# EAGLE board attiny_bo_1l (EAGLE 6.2)
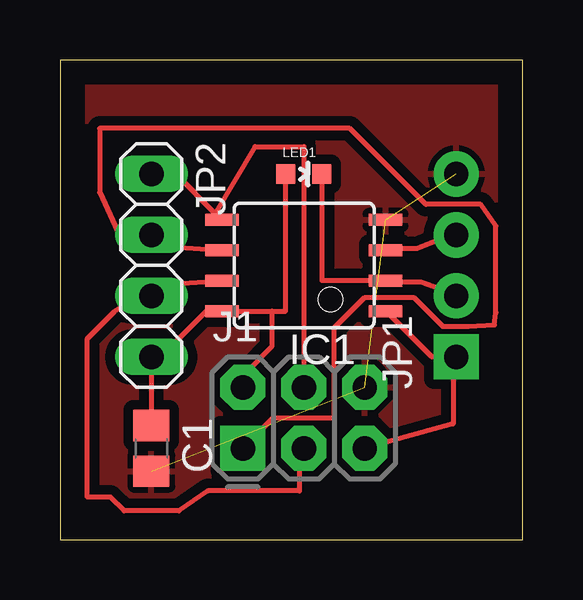
[diagram p0: board, top side]

Size 19.28 x 19.99 mm. Coordinates in mm from the lower left corner, seen from the top.
Outline: 0,0 19.28,0 19.28,19.99 0,19.99 0,0
Copper layers 1: Top 0.035mm
Design rules: minimum track width 8mil, minimum drill 24mil, track to track 8mil, track to pad 8mil, pad to pad 8mil, via to via 8mil, smd to smd 8mil, copper to edge 40mil, drill to drill 8mil, minimum pad ring 10mil, minimum via ring 8mil, stop-mask expansion 4mil, vias tented up to drill 0mil, thermal gap 10mil

## Footprints (pad centres in the part's own frame; a part is rotated, then mirrored left to right if it is on the bottom)
C0805 = smd 1.3 x 1.5: 1 -0.95,0; 2 0.95,0
8S2 = smd 0.5 x 1.4: 1 -1.905,-3.404; 2 -0.645,-3.404; 3 0.625,-3.404; 4 1.895,-3.404; 5 1.905,3.404; 6 0.635,3.404; 7 -0.635,3.404; 8 -1.905,3.404
2X3-NS = drill 1.016 pad 1.88 square: 1 -2.54,-1.27 | drill 1.016 pad 1.88 octagon: 2 -2.54,1.27; 3 0,-1.27; 4 0,1.27; 5 2.54,-1.27; 6 2.54,1.27
1X04_NO_SILK = drill 1.016 pad 1.88 square: 1 0,0 | drill 1.016 pad 1.88: 2 2.54,0; 3 5.08,0; 4 7.62,0
1X04 = drill 1.016 long: 1 -3.81,0; 2 -1.27,0; 3 1.27,0; 4 3.81,0
LED-0603 = smd 0.8 x 0.8: A 0,-0.75; C 0,0.75

## Placement (x,y rotation side)
C1  [C0805]  3.81,3.81 270 top
IC1  ATTiny85  [8S2]  10.16,11.43 90 top
J1  AVR_SPI_PRG_6NS  [2X3-NS]  10.16,5.08 0 top
JP1  [1X04_NO_SILK]  16.51,7.62 90 top
JP2  [1X04]  3.81,11.43 270 top
LED1  [LED-0603]  10.16,15.24 270 top

## Library data of the parts
C1 = rcl
IC1 = atmel; MPN: ATTINY13-20SU; OC_FARNELL: 9171568; OC_NEWARK: 96K6522
J1 JP1 = SparkFun-Connectors
JP2 = pinhead
LED1 = SparkFun-LED

## Nets
+5V: C1.1 IC1.8 J1.2 JP2.4 LED1.A
GND: C1.2 IC1.4 J1.6 JP1.4
IN1/MISO: IC1.6 J1.1 JP2.2
N$1: IC1.3 JP1.3
N$3: IC1.2 JP1.2 LED1.C
N$6: IC1.1 J1.5 JP1.1
SCL/SCK: IC1.7 J1.3 JP2.3
SDA/MOSI: IC1.5 J1.4 JP2.1

## Tracks (layer width: path | path; a pad name or v marks a point on that pad's centre or on a via)
+5V
  Top 0.203: C1.1 JP2.4 4.45,8.26 4.83,8.26 6.1,9.53 IC1.8 8.83,9.53 | 8.83,9.53 9.4,9.53 9.4,15.24 LED1.A | J1.2 7.62,7.18 7.94,7.18 8.83,8.06 8.83,9.53
GND  (3 unrouted)
  pour Top (isolate 0.406): 0,19.94 0,0 35.81,0 35.81,19.94
IN1/MISO
  Top 0.203: IC1.6 6.73,12.06 4.95,12.19 JP2.2 3.3,12.83 2.41,12.83 1.65,14.48 1.65,17.14 12.06,17.14 15.24,13.97 17.53,13.97 18.16,13.08 18.16,9.46 18.1,8.95 17.02,8.89 15.94,8.89 14.73,10.1 12.7,10.1 11.43,8.83 11.43,5.08 8.89,5.08 J1.1
N$1
  Top 0.203: JP1.3 15.94,12.57 14.86,12.13 13.78,12.13 13.59,12.06 IC1.3
N$3
  Top 0.203: LED1.C 10.92,15.24 10.92,10.79 13.53,10.79 IC1.2 13.65,10.73 15.05,10.73 16.26,10.29 JP1.2
N$6
  Top 0.203: IC1.1 13.59,9.53 15.49,7.62 JP1.1 16.38,7.62 16.38,4.83 J1.5
SCL/SCK
  Top 0.203: IC1.7 6.73,10.79 4.7,10.67 JP2.3 2.79,9.91 2.29,9.53 1.14,8.38 1.14,1.78 2.1,1.78 2.67,1.21 4.95,1.21 6.16,2.03 9.97,2.03 9.97,3.81 J1.3
SDA/MOSI
  Top 0.203: 6.48,13.59 4.83,15.24 JP2.1 | 6.48,13.59 6.73,13.34 IC1.5 | J1.4 10.16,16.38 8.13,16.38 6.48,13.59